# EAGLE board projeto elétrico (EAGLE 9.7.0)

Size 170.22 x 66.89 mm. Coordinates in mm from the lower left corner, seen from the top.
Outline: 0,0 170.22,0 170.22,66.89 0,66.89 0,0
Copper layers (1*16): Top 0.035mm / dielectric 1.5mm / Bottom 0.035mm
Design rules "default": minimum track width 6mil, minimum drill 0.35mm, track to track 6mil, track to pad 6mil, pad to pad 6mil, via to via 6mil, smd to smd 6mil, copper to edge 40mil, drill to drill 6mil, minimum pad ring 10mil, minimum via ring 8mil, stop-mask expansion 4mil, vias tented up to drill 0mil, thermal gap 10mil

## Footprints (pad centres in the part's own frame; a part is rotated, then mirrored left to right if it is on the bottom)
LEDRD254W60D565H860B_W = drill 0.981 pad 1.581: 1 -1.27,0; 2 1.27,0
LEDRD254W60D565H860B_B = drill 0.981 pad 1.581: 1 -1.27,0; 2 1.27,0
LEDRD254W60D565H860B_O = drill 0.981 pad 1.581: 1 -1.27,0; 2 1.27,0
LEDRD254W60D565H860B_Y = drill 0.981 pad 1.581: 1 -1.27,0; 2 1.27,0
LEDRD254W60D565H860B = drill 0.981 pad 1.581: 1 -1.27,0; 2 1.27,0
LEDRD254W60D565H860B_G = drill 0.981 pad 1.581: 1 -1.27,0; 2 1.27,0
RESAD1016W63L850D250B = drill 0.83 pad 1.43: 1 -5.08,0; 2 5.08,0
SWITCH-MOMENTARY-PTH-6.5MM = drill 1.016 pad 1.88: 1 -3.251,2.261; 2 3.251,2.261; 3 -3.251,-2.261; 4 3.251,-2.261
ARDUINO-UNO-R3-SHIELD = drill 1.016 pad 1.88: 3.3V 24.13,-2.54; 5V 24.13,0; A0 24.13,12.7; A1 24.13,15.24; A2 24.13,17.78; A3 24.13,20.32; A4 24.13,22.86; A5 24.13,25.4; AREF -24.13,-13.97; D2 -24.13,20.32; D3 -24.13,17.78; D4 -24.13,15.24; D5 -24.13,12.7; D6 -24.13,10.16; D7 -24.13,7.62; D8 -24.13,3.81; D9 -24.13,1.27; D10 -24.13,-1.27; D11 -24.13,-3.81; D12 -24.13,-6.35; D13 -24.13,-8.89; GND@0 24.13,2.54; GND@1 24.13,5.08; GND@2 -24.13,-11.43; IOREF 24.13,-7.62; NC 24.13,-10.16; RES 24.13,-5.08; RX -24.13,25.4; SCL -24.13,-19.05; SDA -24.13,-16.51; TX -24.13,22.86; VIN 24.13,7.62

## Placement (x,y rotation side)
D1  WHITE  [LEDRD254W60D565H860B_W]  137.84,39.45 0 top
D2  BLUE  [LEDRD254W60D565H860B_B]  150.54,39.45 0 top
D3  ORANGE  [LEDRD254W60D565H860B_O]  163.24,39.45 0 top
D4  YELLOW  [LEDRD254W60D565H860B_Y]  125.14,39.45 0 top
D5  RED  [LEDRD254W60D565H860B]  112.44,39.45 0 top
D6  GREEN  [LEDRD254W60D565H860B_G]  99.74,39.45 0 top
R2  220  [RESAD1016W63L850D250B]  134.03,8.97 90 top
R3  220  [RESAD1016W63L850D250B]  146.73,8.97 90 top
R4  220  [RESAD1016W63L850D250B]  121.33,8.97 90 top
R5  220  [RESAD1016W63L850D250B]  108.63,8.97 90 top
R6  220  [RESAD1016W63L850D250B]  95.93,8.97 90 top
R7  220  [RESAD1016W63L850D250B]  159.43,8.97 90 top
R10  1k  [RESAD1016W63L850D250B]  94.07,44.53 330 top
R11  1k  [RESAD1016W63L850D250B]  106.77,44.53 330 top
R12  1k  [RESAD1016W63L850D250B]  119.47,44.53 330 top
R13  1k  [RESAD1016W63L850D250B]  132.17,44.53 330 top
R14  1k  [RESAD1016W63L850D250B]  144.87,44.53 330 top
R15  1k  [RESAD1016W63L850D250B]  157.57,44.53 330 top
S1  SWITCH_MOMENTARY  [SWITCH-MOMENTARY-PTH-6.5MM]  136.57,28.02 90 top
S2  SWITCH_MOMENTARY  [SWITCH-MOMENTARY-PTH-6.5MM]  149.27,28.02 90 top
S3  SWITCH_MOMENTARY  [SWITCH-MOMENTARY-PTH-6.5MM]  161.97,28.02 90 top
S4  SWITCH_MOMENTARY  [SWITCH-MOMENTARY-PTH-6.5MM]  98.47,28.02 90 top
S5  SWITCH_MOMENTARY  [SWITCH-MOMENTARY-PTH-6.5MM]  123.87,28.02 90 top
S6  SWITCH_MOMENTARY  [SWITCH-MOMENTARY-PTH-6.5MM]  111.17,28.02 90 top
U2  ARDUINO-UNO-R3-SHIELD  [ARDUINO-UNO-R3-SHIELD]  47.88,37.04 270 top

## Library data of the parts
D1 = Tinkercad; CATEGORY: Opto-Electronic; SUB-CATEGORY: LED; VALUE: LED_WHITE
D2 = Tinkercad; CATEGORY: Opto-Electronic; SUB-CATEGORY: LED; VALUE: LED_BLUE
D3 = Tinkercad; CATEGORY: Opto-Electronic; SUB-CATEGORY: LED; VALUE: LED_ORANGE
D4 = Tinkercad; CATEGORY: Opto-Electronic; SUB-CATEGORY: LED; VALUE: LED_YELLOW
D5 = Tinkercad; CATEGORY: Opto-Electronic; SUB-CATEGORY: LED; VALUE: LED_RED
D6 = Tinkercad; CATEGORY: Opto-Electronic; SUB-CATEGORY: LED; VALUE: LED_GREEN
R2-R7 R10-R15 S1-S6 U2 = Tinkercad

## Nets
D1_A: D1.1 R13.2
D2_A: D2.1 R14.2
D3_A: D3.1 R15.2
D4_A: D4.1 R12.2
D5_A: D5.1 R11.2
D6_A: D6.1 R10.2
U2_5V: R2.1 R3.1 R4.1 R5.1 R6.1 R7.1 U2.5V
U2_D2: R6.2 S4.1 S4.2 U2.D2
U2_D3: R10.1 U2.D3
U2_D4: R5.2 S6.1 S6.2 U2.D4
U2_D5: R11.1 U2.D5
U2_D6: R4.2 S5.1 S5.2 U2.D6
U2_D7: R12.1 U2.D7
U2_D8: R2.2 S1.1 S1.2 U2.D8
U2_D9: R13.1 U2.D9
U2_D10: R3.2 S2.1 S2.2 U2.D10
U2_D11: R14.1 U2.D11
U2_D12: R7.2 S3.1 S3.2 U2.D12
U2_D13: R15.1 U2.D13
U2_GND: D1.2 D2.2 D3.2 D4.2 D5.2 D6.2 S1.3 S1.4 S2.3 S2.4 S3.3 S3.4 S4.3 S4.4 S5.3 S5.4 S6.3 S6.4 U2.GND@0 U2.GND@1 U2.GND@2

## Tracks (layer width: path | path; a pad name or v marks a point on that pad's centre or on a via)
D1_A  (1 unrouted)
D2_A  (1 unrouted)
D3_A  (1 unrouted)
D4_A  (1 unrouted)
D5_A  (1 unrouted)
D6_A  (1 unrouted)
U2_5V  (6 unrouted)
U2_D2  (3 unrouted)
U2_D3  (1 unrouted)
U2_D4  (3 unrouted)
U2_D5  (1 unrouted)
U2_D6  (3 unrouted)
U2_D7  (1 unrouted)
U2_D8  (3 unrouted)
U2_D9  (1 unrouted)
U2_D10  (3 unrouted)
U2_D11  (1 unrouted)
U2_D12  (3 unrouted)
U2_D13  (1 unrouted)
U2_GND  (20 unrouted)